# Altium PCB I2C_motorDriver.PcbDoc
Units mm, origin at the board's own origin, x right, y up, seen from the top; angles counter-clockwise.
Board outline 19 x 20 mm, 4 copper layers (Top Layer, Int1 (GND), Int2 (PWR), Bottom Layer), stack 1.585 mm thick; 29 components, 29 nets, 113 pads, 43 vias.
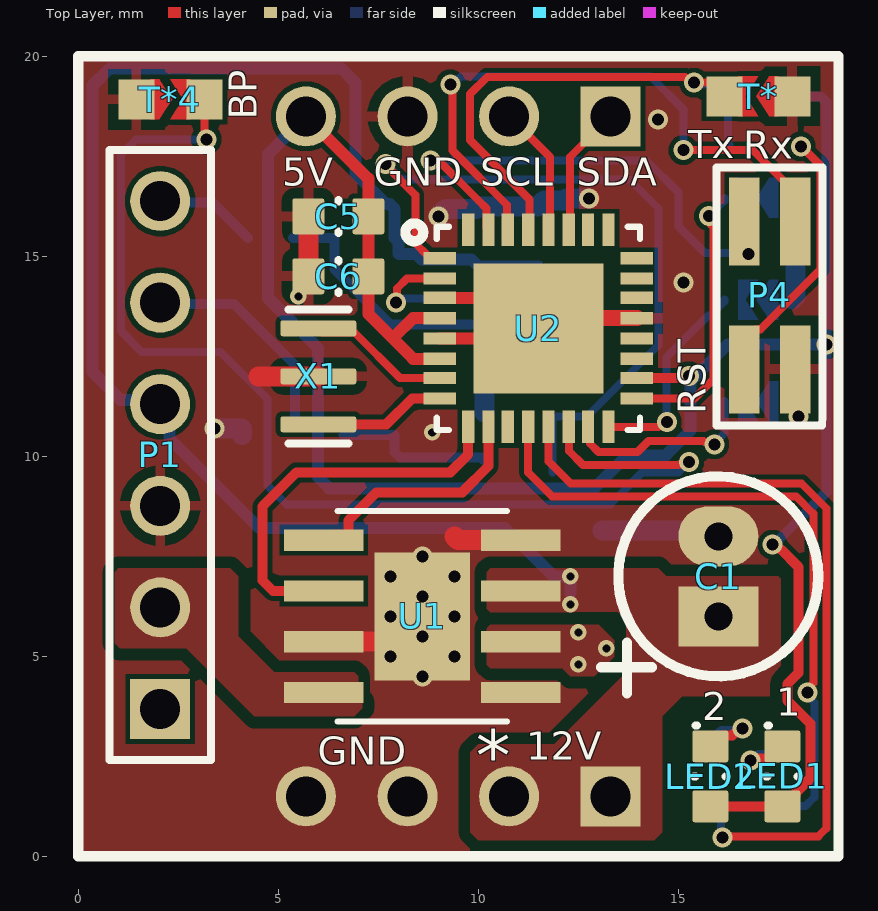
[diagram p0: Top Layer view]
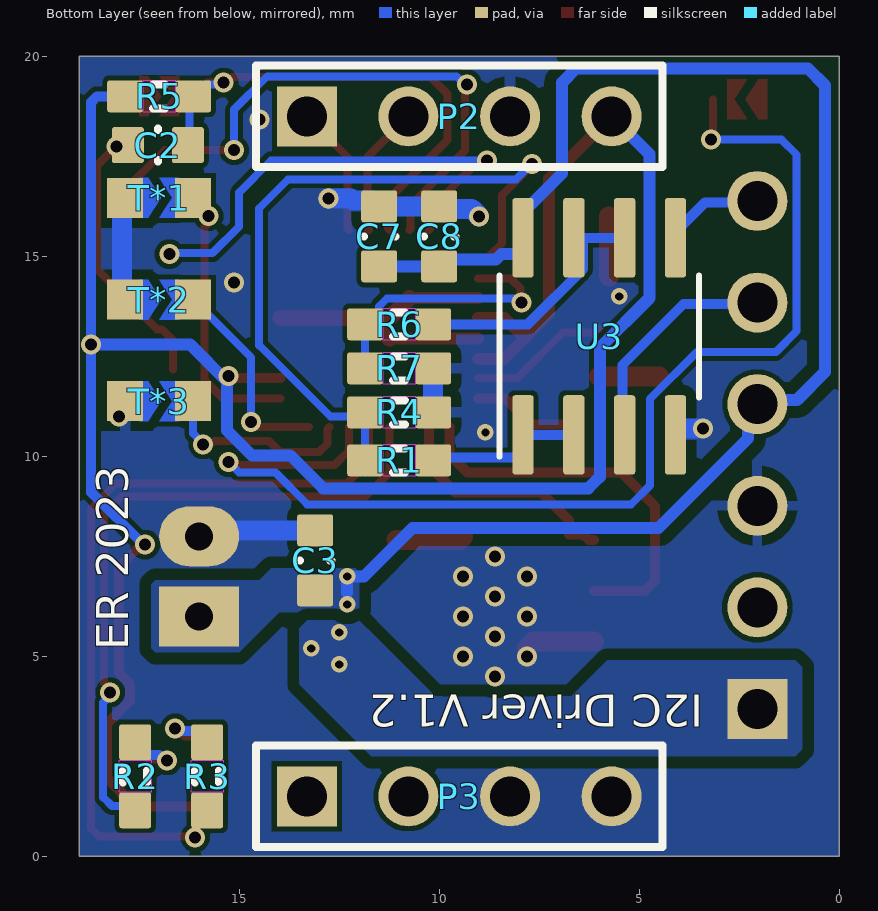
[diagram p1: Bottom Layer view, seen from below]
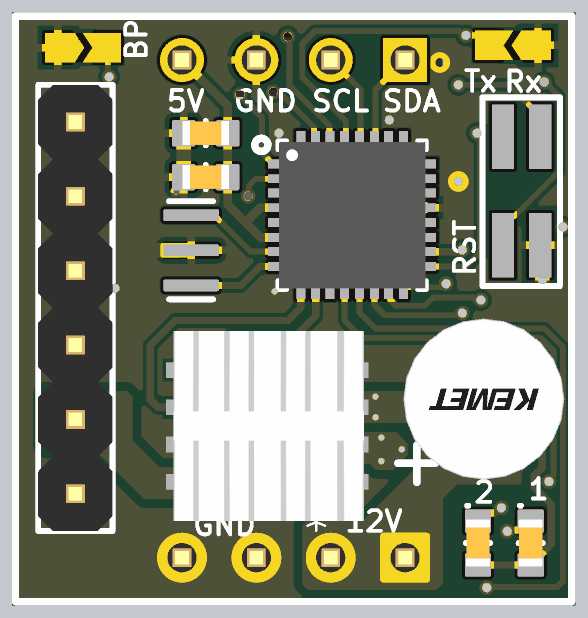
[diagram p2: 3D render of the assembled board from above, using the file's embedded part models]
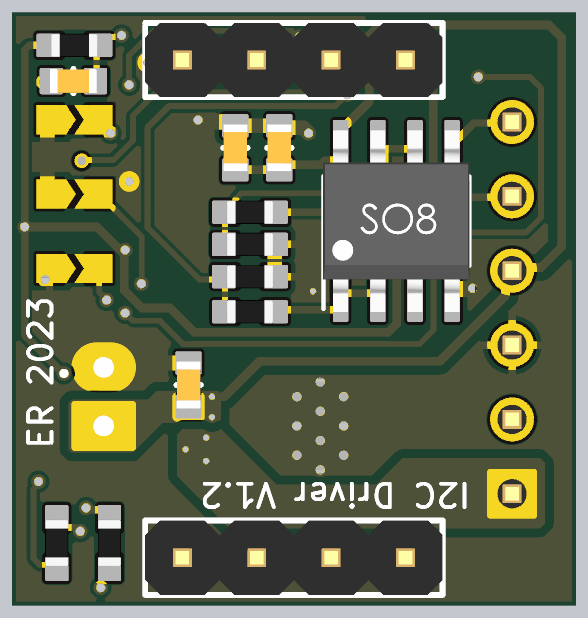
[diagram p3: 3D render of the assembled board from below, using the file's embedded part models]

## Layer stack, top to bottom
Top Solder: solder mask 0.035, SM-001, Dk 4
Top Layer: signal copper 0.035
Dielectric 2: prepreg 0.21, PP-017, Dk 4.6
Int1 (GND): signal copper 0.015
Dielectric 3: core 1.065, Core-039, Dk 4.6
Int2 (PWR): signal copper 0.015
Dielectric 4: prepreg 0.21, PP-017, Dk 4.6
Bottom Layer: signal copper 0.035
Bottom Solder: solder mask 0.035, SM-001, Dk 4

## Board outline
0,0 19.001,0 19.001,20 19,20 0,20

## Design rules (kind name [scope] priority, off if disabled: settings)
Clearance Clearance_Power [InNetClass('Power')] p1: gap=0.3 ignorepadtopadclearanceinfootprint=FALSE except(0.127: SMDPad-SMDPad SMDPad-THPad SMDPad-Via SMDPad-Fill SMDPad-Poly SMDPad-Region SMDPad-Text SMDPad-Hole THPad-THPad THPad-Via THPad-Fill THPad-Poly THPad-Region THPad-Text THPad-Hole)
Clearance Clearance_signal [All] p2: gap=0.125 ignorepadtopadclearanceinfootprint=FALSE
ComponentClearance [All] p1 off: gap=0.254 collisioncheckmode=3 verticalgap=0.254 showdistances=FALSE
DiffPairsRouting [All] p1: maxlimit=0.254 minlimit=0.127 mostfreqgap=0.254 toplayer_maxgap=0.127 toplayer_prefgap=0.127 toplayer_minwidth=0.182 toplayer_maxwidth=0.182 toplayer_prefwidth=0.182 bottomlayer_maxgap=0.127 bottomlayer_prefgap=0.127 bottomlayer_minwidth=0.182 bottomlayer_maxwidth=0.182 bottomlayer_prefwidth=0.182 impedanceprofiledriven=TRUE impedanceprofileid={FA6609CF-BA32-4F74-B84B-CE5609EF71AF} impedanceprofilevalue=90.000000 maxuncoupledlength=12.7
HoleSize [All] p1 off: absolutevalues=TRUE maxlimit=2.54 minlimit=0.025 maxpercent=80.000 minpercent=20.000
HoleToHoleClearance [All] p1: gap=0.4 allowstackedmicrovias=TRUE
MinimumSolderMaskSliver [All] p1 off: minsoldermaskwidth=0.254
PasteMaskExpansion [All] p1 off: expansion=0
PlaneClearance [All] p1: clearance=0.5
PolygonConnect PolygonConnect_Power [InNetClass('Power')] p1: connectstyle=Direct reliefconductorwidth=0.254 reliefentries=4 polygonreliefangle="90 Angle" airgapwidth=0.254
PolygonConnect PolygonConnect_Power_GND [InComponent('U1') or InComponent('P3') or InComponent('C1')] p2: connectstyle=Direct reliefconductorwidth=0.254 reliefentries=4 polygonreliefangle="90 Angle" airgapwidth=0.254
PolygonConnect [All] p3: thpad.connectstyle=Relief thpad.reliefconductorwidth=0.254 thpad.reliefentries=4 thpad.polygonreliefangle="90 Angle" thpad.airgapwidth=0.254 smdpad.connectstyle=Relief smdpad.reliefconductorwidth=0.254 smdpad.reliefentries=4 smdpad.polygonreliefangle="90 Angle" smdpad.airgapwidth=0.254 via.connectstyle=Direct via.reliefconductorwidth=0.254 via.reliefentries=4 via.polygonreliefangle="90 Angle" via.airgapwidth=0.254
RoomDefinition sheet1 [InComponentClass('sheet1')] p1 off: confinementstyle=ConfineIn formatcopy=TRUE lockcomponents=FALSE outline 127,-25 308,-25 308,16 127,16
RoutingVias [All] p1: holewidth=0.3 width=0.5 viastyle="Through Hole" minholewidth=0.15 minwidth=0.25 maxholewidth=1 maxwidth=1.3
SilkToSolderMaskClearance [IsPad] p1 off: minsilkscreentomaskgap=0.254 clearancetoexposedcopper=TRUE
SolderMaskExpansion [All] p1 off: expansion=0.102 istentingtop=FALSE
Width Width_Power(5A) [InNetClass('Power')] p1: maxlimit=2 minlimit=0.3 preferedwidth=1.25
Width Width_signal [All] p2: maxlimit=1 minlimit=0.1 preferedwidth=0.2 minimp=50.000000 maximp=50.000000 favimp=50.000000
22 further rules are at their usual default settings.

## Classes and differential pairs
net class Power: +12 MOTOR_OUT_A6 MOTOR_OUT_B6

## Components (designator, comment, footprint, x,y, rotation, side; value= is the part's Value field where it differs from the comment)
C1 "CAP ALUM 100UF 20% 25V RADIAL" CAPACITOR-Aluminium-5x11mm-2mmPitch 16,7 r180 top value=100uF
C2 "Capacitor-0603-0.1uF-50V-X7R" CAPACITOR-0603 17.034,17.78 r180 bottom value=0.1uF
C3 "Capacitor-0603-1uF-25V-X5R" CAPACITOR-0603 13.1,7.4 r270 bottom value=1uF
C5 "Capacitor-0603-1uF-25V-X5R" CAPACITOR-0603 6.5,16 r0 top value=1uF
C6 "Capacitor-0603-0.1uF-50V-X7R" CAPACITOR-0603 6.5,14.5 r0 top value=0.1uF
C7 "Capacitor-0603-1uF-25V-X5R" CAPACITOR-0603 11.5,15.5 r270 bottom value=1uF
C8 "Capacitor-0603-0.1uF-50V-X7R" CAPACITOR-0603 10,15.5 r270 bottom value=0.1uF
LED1 "B1911USD-20D000114U1930" LED-0603-2PIN 17.6,2 r270 top
LED2 "B1911USD-20D000114U1930" LED-0603-2PIN 15.8,2 r270 top
P1 "6pos-TH-2.54mm" HDR1X6 2.048,3.683 r90 top
P2 "4pos-TH-2.54mm" HDR1X4 9.5,18.5 r180 bottom locked
P3 "4pos-TH-2.54mm" HDR1X4 9.5,1.5 r180 bottom locked
P4 "4pos-SMD-1.27mm-2x2" HDR2X2-SMD-50mils 16.653,15.875 r0 top
R1 "SMT resistor" Resistor-0603 11,9.9 r0 bottom value=1.69k
R2 "SMT resistor" Resistor-0603 17.6,2 r90 bottom value=1k
R3 "SMT resistor" Resistor-0603 15.8,2 r90 bottom value=1k
R4 "SMT resistor" Resistor-0603 11,11.1 r0 bottom value=3.3k
R5 "SMT resistor" Resistor-0603 17,19 r0 bottom value=10k
R6 "SMT resistor" Resistor-0603 11,13.3 r0 bottom value=1.69k
R7 "SMT resistor" Resistor-0603 11,12.2 r0 bottom value=3.3k
T* "NetTie_0603_Short" NetTie-0603-short 17,19 r0 top
T*1 "NetTie_0603_Short" NetTie-0603-short 17,16.46 r0 bottom
T*2 "NetTie_0603_Short" NetTie-0603-short 17,13.92 r0 bottom
T*3 "NetTie_0603_Short" NetTie-0603-short 17,11.38 r0 bottom
T*4 "NetTie_0603_Short" NetTie-0603-short 2.302,18.923 r180 top
U1 "BD62130AEFJ-E2" P-HSOP8 8.6,6 r180 top
U2 "ATMEGA328P-MUR" "VFQFN-32 Exposed Pad" 11.5,13.2 r0 top
U3 "LM358DR" SOIC-8 6,13 r180 bottom
X1 "CSTNE16M0V530000R0" Resonator-CSTNE 6,12 r270 top value="16MHz - 15pF"

## Footprints (in the part's own frame and the unit in brackets; to place one, negate y for a bottom-side part, rotate by r counter-clockwise, add the part's x,y. Pads: shape width x height; smd on the part's side, far side on the other; paste and mask are expansions set on the pad)
CAPACITOR-0603 [mm] "Metric 1608, EIA 0603. Per Yageo Product Specification V2.2"
  rrect15% 0.8x0.9 smd: 1(-0.75,0) 2(0.75,0)
  Top Layer pour cut-out: -0.2,0.2 0.2,0.2 0.2,-0.2 -0.2,-0.2
  silkscreen extent 0,-0.41 0,0.41, body extent -0.93,-0.41 0.93,0.41, height 0.81
CAPACITOR-Aluminium-5x11mm-2mmPitch [mm] "5mm dia x 11mm height Capacitor"
  rect 2x1.5 hole 0.7: 1(0,1)
  oval 2x1.5 hole 0.7: 2(0,-1)
  silkscreen extent -2.5,-2.5 2.94,2.93, body extent -2.75,-2.67 2.75,2.83, height 12.61
HDR1X4 [mm] "Connector; Header; 2 Position"
  rect 1.5x1.5 hole 1: 1(-3.81,0)
  round 1.5 hole 1: 2(-1.27,0) 3(1.27,0) 4(3.81,0)
  silkscreen extent -5.08,-1.27 5.08,1.27, body extent -5.08,-1.27 5.08,1.27, height 8.54
HDR1X6 [mm] "Connector; Header; 2 Position"
  rect 1.5x1.5 hole 1: 1(0,0)
  round 1.5 hole 1: 2(2.54,0) 3(5.08,0) 4(7.62,0) 5(10.16,0) 6(12.7,0)
  silkscreen extent -1.27,-1.27 13.97,1.27, body extent -1.27,-1.27 13.97,1.27, height 8.54
HDR2X2-SMD-50mils [mm] "Connector; Header; 2 Position"
  rect 0.762x2.2 smd: 1(0,0) 2(0,-3.7) 3(1.27,0) 4(1.27,-3.7)
  silkscreen extent -0.7,-5.1 1.95,1.35
LED-0603-2PIN [mm] "Metric 1608, EIA 0603. Per Yageo Product Specification V2.2"
  rrect15% 0.8x0.9 smd: 1(-0.75,0) 2(0.75,0)
  Top Layer pour cut-out: -0.35,0.45 0.35,0.45 0.35,-0.45 -0.35,-0.45
  silkscreen extent -1.28,-0.41 0,0.41, body extent -0.93,-0.41 0.93,0.41, height 0.81
NetTie-0603-short [mm] "Net Tie with an EIA 0603 land pattern"
  rect 0.9x1 smd paste-1 mask+0.102: 1(-0.85,0) 2(0.85,0)
  Top Layer region: -0.5,0.5 0,0.5 -0.125,0.3 -0.325,0 -0.125,-0.3 0,-0.5 -0.5,-0.5
  Top Layer region: 0.5,0.5 0.275,0.5 0.15,0.3 -0.05,0 0.15,-0.3 0.275,-0.5 0.5,-0.5
P-HSOP8 [mil]
  rect 78x21 smd paste+0 mask+0: 1(-97,75) 2(-97,25) 3(-97,-25) 4(-97,-75) 5(97,-75) 6(97,-25) 7(97,25) 8(97,75)
  rect 94x126 smd paste-62.5 mask+0: EPAD(0,0)
  silkscreen extent -84,-104 84,104, body extent -130,-128 126,128, height 201
Resistor-0603 [mm] "Metric 1608, EIA 0603 Drawn per Yageo \"Chip resistors Mounting\" rev 10"
  rrect15% 0.9x0.8 smd: 1(-0.85,0) 2(0.85,0)
  Top Layer pour cut-out: -0.4,0.4 0.4,0.4 0.4,-0.4 -0.4,-0.4
  Top Layer keep-out region: -0.4,0.4 0.4,0.4 0.4,-0.4 -0.4,-0.4
  silkscreen extent -0.15,-0.3 0.15,0.3, body extent -0.8,-0.4 0.8,0.4, height 0.55
Resonator-CSTNE [mm] "Murata CSTNE series resonator. Built from CSTNE20M0VH3C000R0 datasheet"
  rrect30% 0.4x1.9 smd: 1(-1.2,0) 2(0,0) 3(1.2,0)
  silkscreen extent -1.68,-0.75 1.68,0.75, body extent -1.68,-0.75 1.68,0.75, height 1
SOIC-8 [mil] "8-Lead Plastic Small Outline, 0.15in pitch,  LTC DWG # 05-08-1610 Rev G"
  rrect25% 21x78 smd: 1(-75,-97) 2(-25,-97) 3(25,-97) 4(75,-97) 5(75,97) 6(25,97) 7(-25,97) 8(-75,97)
  silkscreen extent -98,-118 98,60, body extent -98,-122 98,122, height 69
"VFQFN-32 Exposed Pad" [mil]
  rect 32x12 smd: 1(-97,69) 2(-97,49) 3(-97,30) 4(-97,10) 5(-97,-10) 6(-97,-30) 7(-97,-49) 8(-97,-69) 17(97,-69) 18(97,-49) 19(97,-30) 20(97,-10) 21(97,10) 22(97,30) 23(97,49) 24(97,69)
  rect 12x32 smd: 9(-69,-97) 10(-49,-97) 11(-30,-97) 12(-10,-97) 13(10,-97) 14(30,-97) 15(49,-97) 16(69,-97) 25(69,97) 26(49,97) 27(30,97) 28(10,97) 29(-10,97) 30(-30,97) 31(-49,97) 32(-69,97)
  rect 128x128 smd: 33(0,0)
  silkscreen extent -131,-100 100,103, body extent -98,-98 98,98, height 39

## Part data
C1: library part Capacitor-100uF-25V, Supplier Part Number 1=399-6102-ND, Volt=25V, Mounted=Yes, Precision=20%, Supplier 1=Digi-Key, Supplier 2=Digi-Key, Supplier 3=Digi-Key, Supplier 4=Digi-Key
C2 C6 C8: Package / Case="Metric 1608, EIA 0603", Supplier Part Number 1=1276-1935-2-ND, Volt=50V, Mounted=Yes, Precision=X7R-10%, Supplier 1=Digi-Key, Supplier 2=Digi-Key, Supplier 3=Digi-Key, Supplier 4=Digi-Key, Supplier Part Number 2=1276-1934-2-ND
C3 C5 C7: Package / Case="Metric 1608, EIA 0603", Supplier Part Number 1=1276-1859-2-ND, Volt=25V, Mounted=Yes, Precision=X5R-10%, Supplier 1=Digi-Key, Supplier 2=Digi-Key, Supplier 3=Digi-Key, Supplier 4=Digi-Key, Supplier Part Number 2=1276-1942-2-ND
LED1 LED2: "LED RED CLEAR 1608 SMD", Package / Case="0603 (1608 Metric)", Supplier Part Number 1=3147-B1911USD-20D000114U1930CT-ND, Mounted=Yes, Supplier 1=Digi-Key
P1: "6pos TH 2.54mm Header", Package / Case=TH, Supplier Part Number 1=N/A, Mounted=Yes, Supplier 1=Digi-Key, Volt=N/A
P2 P3: "4pos TH 2.54mm Header", Package / Case=TH, Supplier Part Number 1=N/A, Mounted=Yes, Supplier 1=Digi-Key, Volt=N/A
P4: "4pos SMD 1.27mm", Package / Case=TH, Supplier Part Number 1=S9012E-02-ND, Volt=N/A, Mounted=Yes, Supplier 1=Digi-Key
R1 R6: library part Resistor0603-1.69k, "Resistor0603-1.69k", Package / Case="Metric 1608, EIA 0603", Supplier Part Number 1=RMCF0603FT1K69CT-ND, Mounted=Yes, Precision=1%, Supplier 1=Digi-Key, Supplier 2=Digi-Key, Supplier 3=Digi-Key, Supplier 4=Digi-Key, Watt=0.25W
R2 R3: library part Resistor0603-1k, "Resistor0603-1k", Package / Case="Metric 1608, EIA 0603", Supplier Part Number 1=RMCF0603FT1K00TR-ND, Mounted=Yes, Precision=1%, Supplier 1=Digi-Key, Supplier 2=Digi-Key, Supplier 3=Digi-Key, Supplier 4=Digi-Key, Supplier Part Number 2=311-1.00KHRTR-ND, Supplier Part Number 3=AG1307TR-ND, Watt=0.1W
R4 R7: library part Resistor0603-3.3k, "Resistor0603-3.3k", Package / Case="Metric 1608, EIA 0603", Supplier Part Number 1=311-3.30KHRCT-ND, Mounted=Yes, Precision=5%, Supplier 1=Digi-Key, Supplier 2=Digi-Key, Supplier 3=Digi-Key, Supplier 4=Digi-Key, Watt=0.25W
R5: library part Resistor0603-10k, "Resistor0603-10k", Package / Case="Metric 1608, EIA 0603", Supplier Part Number 1=311-10.0KHRTR-ND, Mounted=Yes, Precision=1%, Supplier 1=Digi-Key, Supplier 2=Digi-Key, Supplier 3=Digi-Key, Supplier 4=Digi-Key, Supplier Part Number 2=RMCF0603FT10K0TR-ND, Watt=0.1W
U1: "1 CHANNEL H BRIDGE Motor. 28V, 3A", Package / Case=8-HTSOP-J, Supplier Part Number 1=BD62130AEFJ-E2CT-ND, Mounted=Yes, Supplier 1=Digi-Key
U2: "AVR AVR® ATmega Microcontroller IC 8-Bit 20MHz 32KB (16K x 16) FLASH 32-VQFN (5x5)", Supplier Part Number 1=ATMEGA328P-MURTR-ND, HelpURL=https://ww1.microchip.com/downloads/en/DeviceDoc/ATmega48A-PA-88A-PA-168A-PA-328-P-DS-DS40002061B.pdf, RefDes=RefDes, Supplier 1=Digikey, Type=Type
U3: "IC OPAMP GP 2 CIRCUIT 8SOIC", Package / Case=SOIC-8, Supplier Part Number 1=296-1014-2-ND, Grade=None, HelpURL=https://www.digikey.ca/en/products/detail/texas-instruments/LM358DR/276658?s=N4IgTCBcDa4JwDYC0BGADCgLEsSByAIiALoC%2BQA, Mounted=Yes, Supplier 1=Digi-Key
X1: "CERAMIC RES 16.0000MHZ 15PF SMD", Package / Case="3-SMD 3.20mm x 1.30mm", Supplier Part Number 1=490-17948-2-ND, Mounted=Yes, Precision=±0.20%, Supplier 1=Digi-Key

## Via types
v1: diameter 0.5, hole 0.3, Top Layer to Bottom Layer, tented both sides, 33 vias
v2: diameter 0.406, hole 0.203, Top Layer to Bottom Layer, tented both sides, 7 vias
v3: diameter 0.5, hole 0.3, Top Layer to Bottom Layer, 3 vias

## Nets (pads, with @x,y where several pads share a name; then routed paths per layer and width w, separated by ;. In a path a pad name is that pad's centre, name@x,y a point inside that pad or via, vN(x,y) a via of type N, cw(c..) or ccw(c..) an arc to the next point about the centre after c; other vN are vias at no path point)
+5: C5.2 C6.2 LED1.2 LED2.2 P2.4 R5.2 U2.4 U2.6 U2.18 | length 57.4
  Top Layer w0.25: U2.18 15.169,11.955 15.208,11.994 v1@15.251,11.994 ; LED2.2 LED1.2 17.65,1.25 17.925,1.525 17.925,1.575 18.3,1.95 18.3,2.282 18.3,3.318 17.725,3.893 17.725,4.307 18,4.582 18,7.239 17.571,7.668 17.548,7.668 17.423,7.793 v1(17.356,7.793)
  Top Layer w0.3: P2.4 7.25,16.94 C5.2 C6.2 7.25,13.561 7.811,12.999 ; U2.6 8.373,12.438 7.811,12.999 ; U2.4 8.367,13.454 7.913,12.999 7.811,12.999
  Bottom Layer w0.25: v1(17.356,7.793) 17.393,7.793 18.7,9.1 v1(18.7,12.8) 18.7,18.854 18.554,19 R5.2
  Bottom Layer w0.3: P2.4 4.743,17.553 4.743,13.957 5.986,12.714 5.986,9.485 6.271,9.2 12.9,9.2 13.726,10.026 14.687,10.026 15.3,10.639 15.3,11.869 16.231,12.8 v1(18.7,12.8)
  other v1: 15.264,12.008
+12: C1.1 C3.2 C7.2 C8.2 P1.4 P3.1 P3.2 U1.3 U3.8 | length 37.7
  Bottom Layer w0.3: P1.4@1.723,11.303 P1.4 1.942,11.409 1.057,11.409 0.355,12.112 0.355,19.272 0.783,19.7 5.193,19.7 6.571,19.7 6.926,19.345 6.926,17.074 7.696,16.304 7.788,16.304 7.905,16.188 U3.8 ; P1.4@1.797,11.23 2.278,10.749 2.278,10.452 4.524,8.206 10.672,8.206 11.879,7 v2(12.3,7) 12.3,6.579 ; U3.8@8,15.5 8,15.076 8.022,15.054 8.446,15.054 8.577,14.923 9.827,14.923 C8.2 C7.2
  other v2: 12.3,6.3
GND: C1.2 C3.1 C5.1 C6.1 C7.1 C8.1 P1.3 P2.3 P3.3 P3.4 P4.4 R4.1 R7.1 T*1.2 T*2.2 T*3.2 T*4.2 T*.2 U1.1 U1.4 U1.7 U1.EPAD U2.3 U2.5 U2.21 U2.33 U3.4 X1.2 | length 26
  Top Layer w0.3: U2.5 U2.33@11.246,12.946 ; U2.3 U2.33@10.738,13.962
  Top Layer w0.4: U2.33@10.738,13.962 U2.33 ; U2.33@11.246,12.946 U2.33 ; U2.21 11.754,13.454 U2.33
  Top Layer w0.5: 4.5,12 X1.2 ; C6.1 C5.1 ; U1.7 7.656,5.365 7.8,5.221 v1(7.8,5) ; 9.4,8 9.495,7.905 U1.4 ; v1(12.773,16.45) v1@12.778,16.445
  Bottom Layer w0.5: v1(3.4,10.7) 4.078,10.7 4.095,10.683 U3.4 ; v1(9,16) 9.187,16.187 9.937,16.187 C8.1 C7.1 11.65,16.4 12.157,16.4 12.207,16.45 v1(12.773,16.45) ; R4.1 R7.1 ; C3.1 15.85,8.15 C1.2 ; T*2.2 17.925,13.995 17.925,16.385 T*1.2
  other v1: 8.6,4.5 9.4,5 8.6,5.5 7.8,6 9.4,6 8.6,6.5 7.8,7 9.4,7 8.6,7.5 18,11
  other v2: 8.848,10.6 5.5,14
  other v3: 15.129,14.351 14.494,18.415
MCU_MOTOR_A: U1.5 U2.10 | length 6.1
  Top Layer w0.25: U1.5 6.258,7.905 6.4,8.047 6.754,8.047 6.754,8.4 7.453,9.1 9.6,9.1 10.255,9.755 U2.10
MCU_MOTOR_B: U1.6 U2.9 | length 9.9
  Top Layer w0.25: U1.6 4.865,6.635 4.605,6.895 4.605,8.75 5.455,9.6 9.3,9.6 9.747,10.047 U2.9
MOTOR_OUT_A6: P1.2 U1.8
MOTOR_OUT_B6: P1.1 U1.2
  other v2: 12.5,4.8 13.2,5.2 12.5,5.6
NetC2_2: C2.2 R5.1 T*.1 U2.29 | length 12.9
  Top Layer w0.2: U2.29 11.282,15.7 11.282,16.418 9.795,17.905 9.795,19.057 10.224,19.486 15.164,19.486 15.309,19.341 v1(15.39,19.341) 15.809,19.341 T*.1
  Bottom Layer w0.2: v1(15.39,19.341) 15.441,19.291 15.859,19.291 R5.1 16.242,18.908 16.242,17.822 C2.2
NetLED1_1: LED1.1 R2.2 | length 2
  Top Layer w0.25: v1(16.8,2.4) 16.848,2.448 17.248,2.448 17.55,2.75 LED1.1
  Bottom Layer w0.25: v1(16.8,2.4) 16.868,2.4 17.001,2.533 17.325,2.533 17.6,2.808 R2.2
NetLED2_1: LED2.1 R3.2 | length 1.9
  Top Layer w0.25: LED2.1 16.075,3.025 16.357,3.025 16.532,3.2 v1(16.6,3.2)
  Bottom Layer w0.25: R3.2 15.8,2.861 16.075,3.136 16.468,3.136 16.532,3.2 v1(16.6,3.2)
NetR1_1: R1.1 U3.1 U3.2 | length 4
  Bottom Layer w0.25: U3.2 U3.1 7.905,10.111 8.047,9.97 10.08,9.97 R1.1
NetR2_1: R2.1 U2.12 | length 16.9
  Top Layer w0.2: U2.12 11.246,9.594 11.84,9 17.94,9 18.375,8.565 18.375,4.331 18.225,4.181 v1(18.225,4.1)
  Bottom Layer w0.2: R2.1 17.708,1.258 18.183,1.258 18.4,1.475 18.4,3.844 18.225,4.019 v1(18.225,4.1)
NetR3_1: R3.1 U2.13 | length 19.8
  Top Layer w0.2: U2.13 11.754,9.876 12.305,9.325 18.075,9.325 18.7,8.7 18.7,0.7 18.5,0.5 16.1,0.5 v1(16.1,0.475)
  Bottom Layer w0.2: R3.1 16.07,0.88 16.07,0.505 v1(16.1,0.475)
NetR6_1: R6.1 U3.6 U3.7 | length 6.1
  Bottom Layer w0.25: U3.6 6.4,15.464 6.4,14.686 7.786,13.3 R6.1
NetT*1_1: T*1.1 U2.17 | length 6.9
  Top Layer w0.2: U2.17 15.403,11.447 15.874,11.918 15.874,15.735 15.821,15.787 15.821,15.945 v1(15.764,16.002)
  Bottom Layer w0.2: v1(15.764,16.002) 16.15,16.388 T*1.1
NetT*2_1: T*2.1 U2.16 | length 5.2
  Top Layer w0.2: U2.16 14.509,10.736 14.631,10.859 v1(14.712,10.859)
  Bottom Layer w0.2: v1(14.712,10.859) 14.7,10.871 14.7,12.47 15.75,13.52 15.8,13.52 16.15,13.87 T*2.1
NetT*3_1: T*3.1 U2.15 | length 5
  Top Layer w0.2: U2.15 12.797,10.684 12.797,10.315 13.007,10.105 13.979,10.105 14.258,10.384 15.633,10.384 15.659,10.357 15.843,10.357 v1(15.9,10.3)
  Bottom Layer w0.2: v1(15.9,10.3) 15.9,10.317 16.15,10.567 T*3.1
NetT*4_1: T*4.1 U2.14 | length 29.2
  Top Layer w0.2: T*4.1 3.152,17.973 v1(3.202,17.923) ; U2.14 12.262,10.138 12.62,9.78 14.996,9.78 15.015,9.799 15.21,9.799 v1(15.267,9.856)
  Bottom Layer w0.2: v1(3.202,17.923) 1.448,17.923 1.063,17.539 1.063,13.13 1.583,12.61 3.558,12.61 4.73,11.438 4.73,9.27 5.2,8.8 13.3,8.8 14.095,9.595 15,9.595 15.261,9.856 v1(15.267,9.856)
NetU2_7: U2.7 X1.1 | length 3.6
  Top Layer w0.2: X1.1 6.1,13.1 6.9,13.1 8.045,11.955 U2.7
NetU2_8: U2.8 X1.3 | length 2.8
  Top Layer w0.25: X1.3@6.5,10.8 7.7,10.8 8.347,11.447 U2.8
QEI_A: R6.2 R7.2 U2.2 | length 6.9
  Top Layer w0.2: v1(7.946,13.846) 7.971,13.871 7.971,14.2 8.216,14.445 U2.2
  Bottom Layer w0.2: v1(7.946,13.846) 8.028,13.846 8.131,13.95 11.3,13.95 11.5,13.75 11.5,13.6 11.8,13.3 R6.2 R7.2
QEI_B: R1.2 R4.2 U2.1 | length 18.5
  Top Layer w0.2: v1(7.676,17.314) 7.676,17.282 8.425,16.533 8.425,15.325 8.73,15.02 8.73,15.005 8.782,14.953 U2.1
  Bottom Layer w0.2: v1(7.676,17.314) 7.691,17.314 8.08,16.925 13.775,16.925 14.5,16.2 14.5,12.776 12.724,11 11.95,11 11.85,10.9 R1.2@11.85,9.6
QEI_IN_A: P1.5 U3.3 | length 6
  Bottom Layer w0.25: P1.5@1.5,13.81 3.89,13.81 5.42,12.28 U3.3@5.42,10.836
QEI_IN_B: P1.6 U3.5 | length 3.1
  Bottom Layer w0.25: P1.6@1.5,16.35 3.35,16.35 U3.5@4.236,15.464
RST_PROG: C2.1 P4.2 | length 6.6
  Top Layer w0.2: P4.2 16.653,12.894 16.934,13.175 17.057,13.175 18.558,14.676 18.558,17.272 18.083,17.747 v1(18.063,17.747)
RX: P4.3 U2.30 | length 15.5
  Top Layer w0.2: v1(9.3,19.3) 9.357,19.243 9.357,17.643 10.722,16.278 10.722,15.68 U2.30 ; v1(15.129,17.653) 16.864,17.653 17.923,16.594 P4.3
  Bottom Layer w0.2: v1(9.3,19.3) 9.367,19.3 9.567,19.5 14.298,19.5 15.129,18.669 v1(15.129,17.653)
SCL: P2.2 U2.28 | length 3.3
  Top Layer w0.2: P2.2 11.79,17.48 11.79,15.7 U2.28
SDA: P2.1 U2.27 | length 3.3
  Top Layer w0.2: U2.27 12.298,15.7 12.298,17.488 P2.1
TX: P4.1 U2.31 | length 12
  Top Layer w0.2: v1(8.8,17.4) 8.857,17.343 9.057,17.343 10,16.4 10.204,16.196 10.204,15.715 U2.31 ; v3(16.749,15.057) 16.831,15.057 P4.1@16.888,15.115
  Bottom Layer w0.2: v1(8.8,17.4) 14.2,17.4 15.002,16.598 15.002,15.748 15.669,15.081 16.726,15.081 v3(16.749,15.057)
pads on no net: U2.11 U2.19 U2.20 U2.22 U2.23 U2.24 U2.25 U2.26 U2.32

## Polygon pours and split planes (outlines as drawn)
MOTOR_OUT_B6 on Bottom Layer "MOTOR_OUT_B6_L04_P006" (solid, remove dead copper, pour order 6): 0.925,4.725 1.1,4.9 5.8,4.9 6.7,4 10.1,4 11.6,5.5 12,5.9 13.3,5.9 13.5,5.7 13.5,4.3 11.7,2.5 1.1,2.5 0.925,2.675
GND on Bottom Layer "GND_L04_P009" (solid, remove dead copper, pour order 9): 0,0 19,0 19,20 0,20
+12 on Bottom Layer "+12_L04_P008" (solid, remove dead copper, pour order 8): 12,6.2 12.1,6.1 14,6.1 15,5.1 17.1,5.1 17.2,5.2 17.2,6.8 17.1,6.9 14.5,6.9 14.2,7.2 12.1,7.2 12,7.1
GND on Bottom Layer "GND_L04_P001" (solid, remove dead copper, pour order 1): 7.3,4.3 9.9,4.3 9.9,7.9 7.3,7.9
GND on Top Layer "GND_L01_P010" (solid, remove dead copper, pour order 10): 0,0 19,0 19,20 0,20
+12 on Top Layer "+12_L01_P002" (solid, remove dead copper, pour order 2): 14.4,0.4 14.6,0.6 14.6,3.5 15.1,4 17.3,4 17.7,4.4 17.7,6.8 17.5,7 14.7,7 14.5,7.2 10.3,7.2 10.1,7 10.1,6.3 10.3,6.1 13.5,6.1 13.7,5.9 13.7,4.6 11.9,2.8 10,2.8 9.8,2.6 9.8,0.6 10,0.4
GND on Top Layer "GND_L01_P007" (solid, remove dead copper, pour order 7): 9.2,0.4 9.4,0.6 9.4,2.6 9.9,3.1 11.8,3.1 12.5,3.8 12.5,4.3 12.4,4.3 12.3,4.4 7.4,4.4 7.4,3.7 7,3.3 5,3.3 4.8,3.1 4.8,0.6 5,0.4
MOTOR_OUT_B6 on Top Layer "MOTOR_OUT_B6_L01_P005" (solid, remove dead copper, pour order 5): 10.3,5.8 12.1,5.8 12.2,5.9 12.9,5.9 13.4,5.4 13.4,5 12.9,4.5 12.3,4.5 12.1,4.7 10.3,4.7 10.1,4.9 10.1,5.6
MOTOR_OUT_A6 on Top Layer "MOTOR_OUT_A6_L01_P004" (solid, remove dead copper, pour order 4): 1.032,5.2 0.905,5.327 0.905,7.105 1,7.2 1.032,7.2 3.8,7.2 4,7 4,5.5 4.9,4.6 6.9,4.6 7.1,4.4 7.1,3.7 6.9,3.5 4.4,3.5 2.7,5.2
GND on Top Layer "GND_L01_P000" (solid, remove dead copper, pour order 0): 7.3,4.1 9.9,4.1 9.9,8.5 7.3,8.5

## Silkscreen, mask and mechanical layers (free items; w line width, h text height)
Top Overlay:
  lines w0.254: 0,0 0,20 19,20 19.001,0 17.001,0 0,0
  text "BP" at 4.458,18.418 h0.7 r90
  text "Tx" at 15.25,17.446 h0.7
  text "Rx" at 16.625,17.437 h0.7
  text "5V" at 5.099,16.767 h0.7
  text "GND" at 7.385,16.767 h0.7
  text "SCL" at 10.052,16.767 h0.7
  text "SDA" at 12.465,16.767 h0.7
  text "RST" at 15.682,11.05 h0.7 r90
  text "1" at 17.451,3.513 h0.7
  text "2" at 15.599,3.405 h0.7
  text "12V" at 11.195,2.416 h0.7
  text "GND" at 5.988,2.289 h0.7
Bottom Overlay:
  text "ER 2023" at 17.773,5.148 h0.8 r270
  text "I2C Driver V1.2" at 3.398,4.034 h0.8 r180
Board:
  lines w0.254: 0,0 0,20 19,20 19.001,0 17.001,0 0,0

## Text inside footprints (layer, text, board x,y; h text height)
U1: Top Overlay "*" at 10.811,3.683 h1.27 r180; Mechanical 7 "Default Padstyle: RX78Y21D0T" at 17.49,13.582 h1.27 r180; Mechanical 7 "Pin One Padstyle: RX78Y21D0T" at 17.49,15.106 h1.27 r180; Mechanical 7 "Heat Tab Padstyle: RX94Y126D0T" at 18.125,16.63 h1.27 r180; Mechanical 7 "Alt 1 Padstyle: OX60Y90D30P" at 3.826,18.542 h1.27 r180; Mechanical 7 "Alt 2 Padstyle: OX90Y60D30P" at 17.173,21.202 h1.27 r180; Mechanical 7 "0.157in/3.988mm" at 10.981,1.085 h0.64 r180; Mechanical 7 "0.244in/6.198mm" at 10.981,-0.82 h0.64 r180; Mechanical 7 "0.197in/5.004mm" at 3.558,6.318 h0.64 r180; Mechanical 7 "0.05in/1.27mm" at 18.239,5.048 h0.64 r180; Mechanical 7 "0.05in/1.27mm" at 13.128,11.55 h0.64 r180; Mechanical 13 "*" at 10.53,4.844 h1.27 r180